# Altium PCB GD_Tcontroller_M.PcbDoc
Units mil, origin at the board's own origin, x right, y up, seen from the top; angles counter-clockwise.
Board outline 5905.51 x 3149.61 mil, 2 copper layers (Top Layer, Bottom Layer); 83 components, 47 nets, 244 pads, 7 vias.
Unrouted connection lines stored in the file: 67.
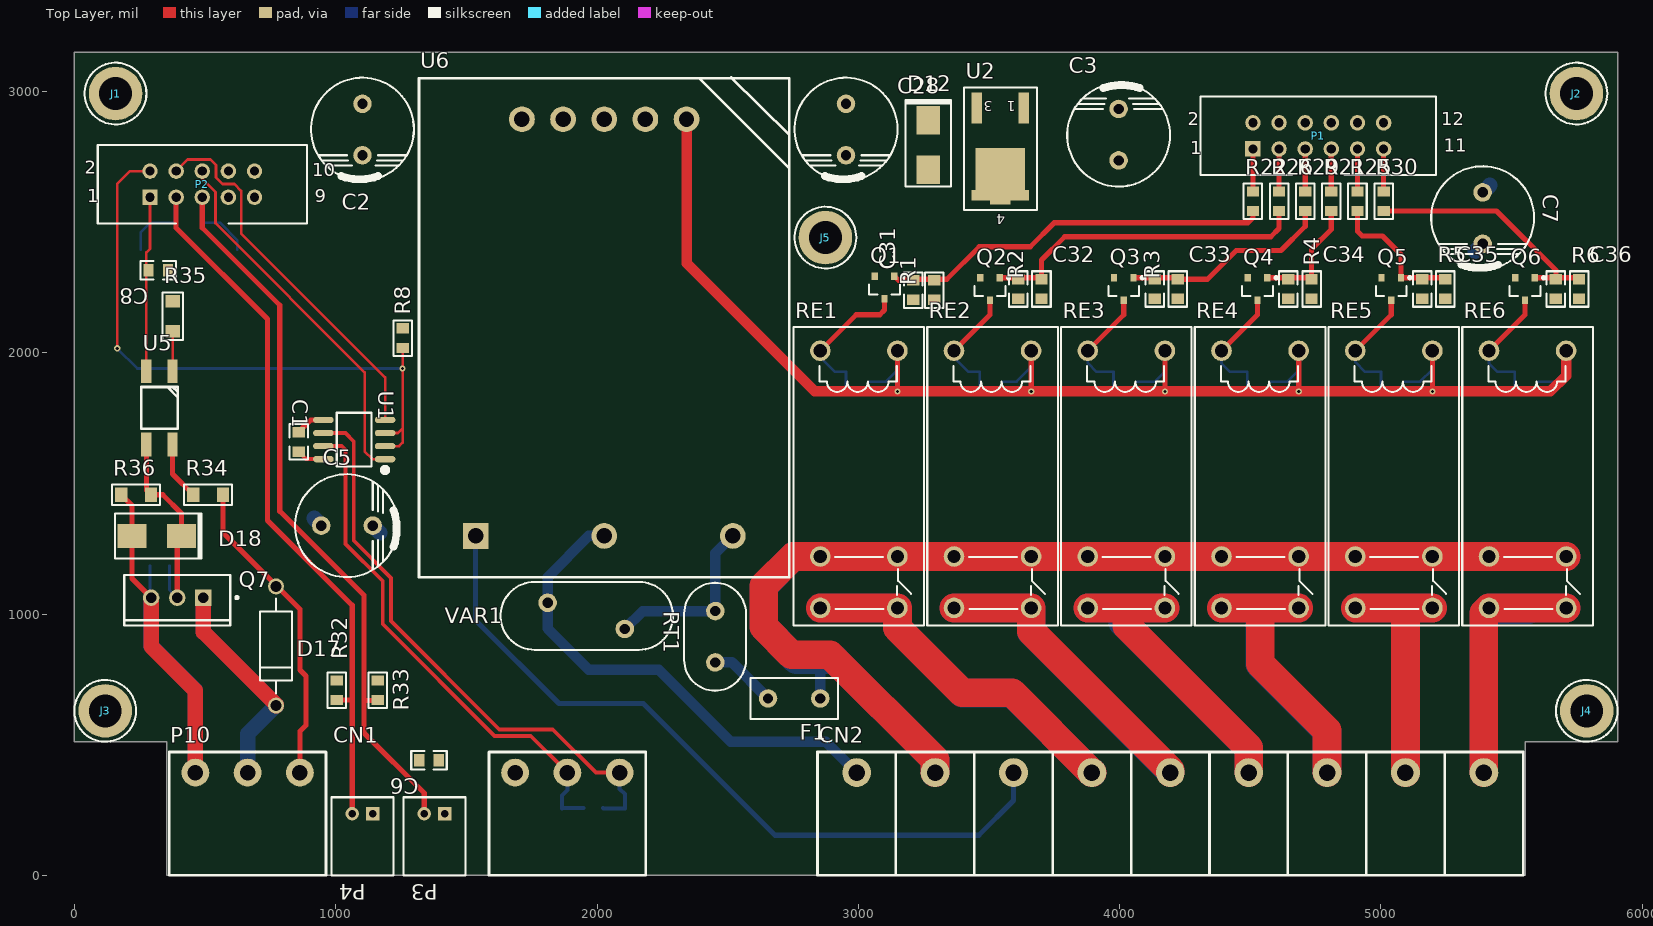
[diagram p0: Top Layer view]
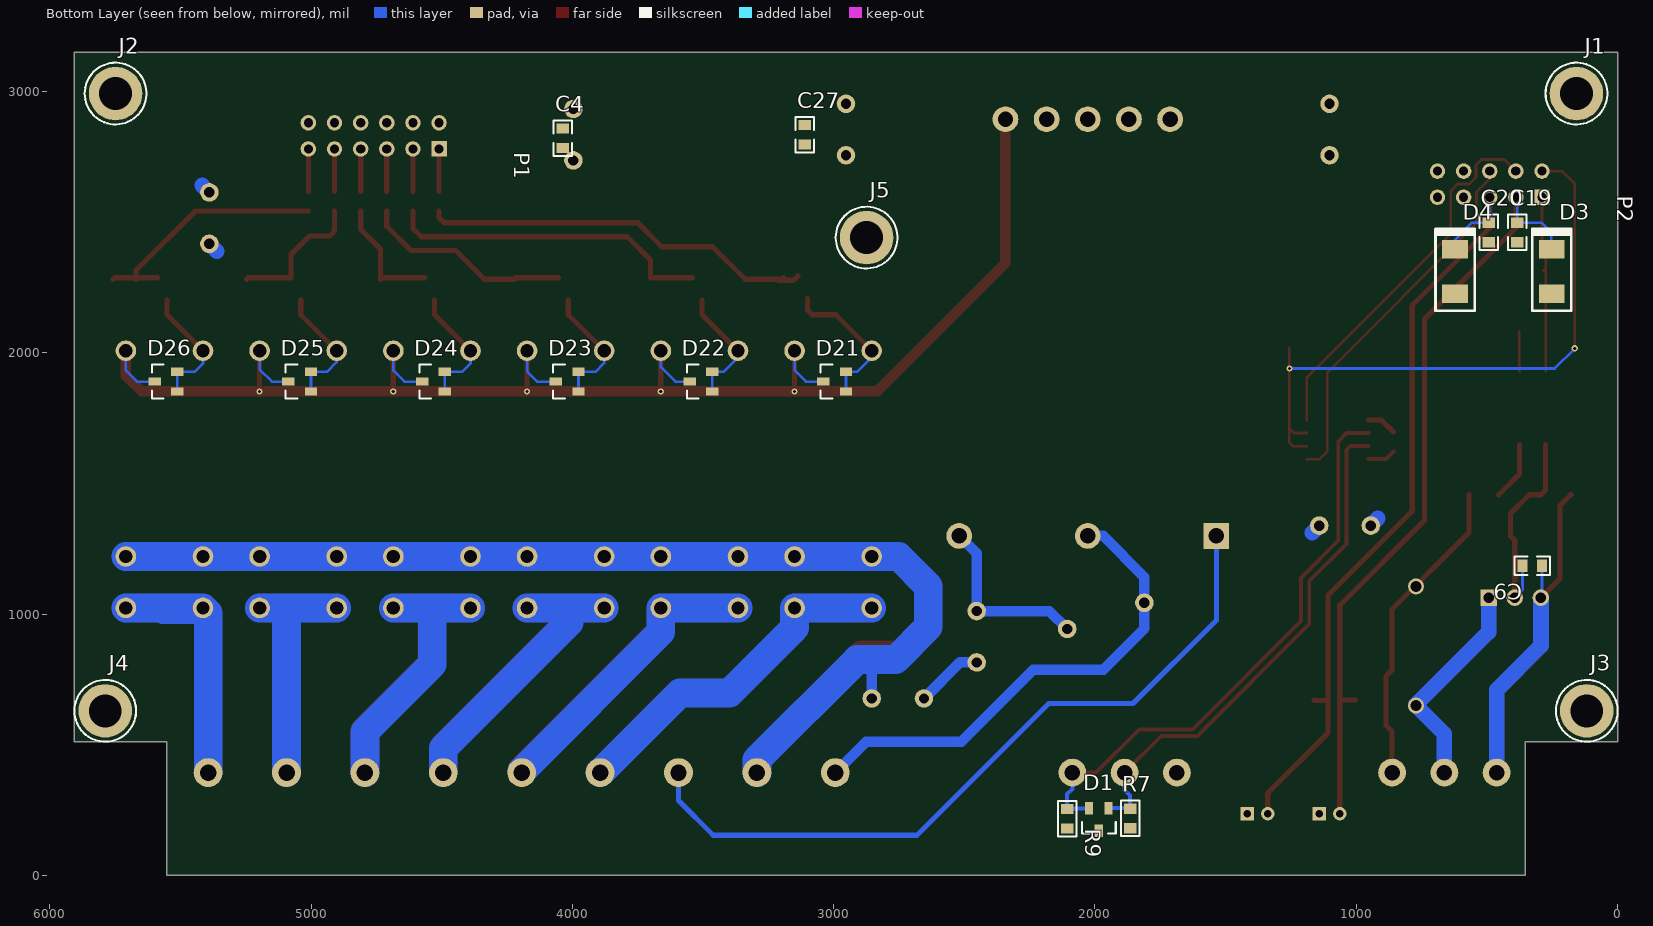
[diagram p1: Bottom Layer view, seen from below]

## Layer stack, top to bottom
Top Solder: solder mask 0.4, Solder Resist, Dk 3.5
Top Layer: signal copper 1.4
Dielectric 1: dielectric 12.6, FR-4, Dk 4.8
Bottom Layer: signal copper 1.4
Bottom Solder: solder mask 0.4, Solder Resist, Dk 3.5

## Board outline
0,511.81 354.33,511.81 354.33,0 5551.18,0 5551.18,511.81 5905.51,511.81 5905.51,3149.6 5905.51,3149.61 0,3149.61

## Design rules (kind name [scope] priority, off if disabled: settings)
Clearance [All] p1: gap=10
DiffPairsRouting [All] p1: maxlimit=10 minlimit=10 mostfreqgap=10 toplayer_minwidth=15 toplayer_maxwidth=15 toplayer_prefwidth=15 bottomlayer_minwidth=15 bottomlayer_maxwidth=15 bottomlayer_prefwidth=15 maxuncoupledlength=500
PolygonConnect [All] p1: connectstyle=Relief reliefconductorwidth=10 reliefentries=4 polygonreliefangle="90 Angle" airgapwidth=10
RoutingVias [All] p1: holewidth=12 width=24 viastyle="Through Hole" minholewidth=12 minwidth=24 maxholewidth=28 maxwidth=50
SolderMaskExpansion [All] p1: expansion=4
Width [All] p1: maxlimit=500 minlimit=8 preferedwidth=8
29 further rules are at their usual default settings.

## Classes and differential pairs
component class GD_Tcontroller: CN1 D3 D4 J1 J2 J3 J4 J5 P1 P2 P3 P4
component class U_GD_Tcontroller_PWM: C8 C9 D17 D18 P10 Q7 R34 R35 R36 U5
component class U_GD_Tcontroller_Sensor: C19 C20 R32 R33
component class U_GD_Tcontroller_Relay: C31 C32 C33 C34 C35 C36 CN2 D21 D22 D23 D24 D25 D26 Q1 Q2 Q3 Q4 Q5 Q6 R1 R2 R3 R4 R5 R6 R21 R22 R25 R26 R29 R30 RE1 RE2 RE3 RE4 RE5 RE6
component class GD_Tcontroller_485: C1 D1 R7 R8 R9 U1
component class U_GD_Tcontroller_Power: C2 C3 C4 C5 C6 C7 C27 C28 D12 F1 RT1 U2 U6 VAR1
differential pair RS485: +RS485_P -RS485_N

## Components (designator, comment, footprint, x,y, rotation, side; value= is the part's Value field where it differs from the comment)
C1 "CAP" C0805 858,1659 r90 top
C2 "CAPACITOR" CA10X16P5#1 1102.36,2755.91 r90 top
C3 "CAPACITOR" CA10X16P5#1 3996.06,2933.07 r270 top
C4 "CAP" C0805 4036.42,2820.87 r270 bottom
C5 "CAPACITOR" CA10X16P5#2 1141.73,1338.58 r180 top
C6 "CAP" C0805 1357,441 r0 top
C7 "CAPACITOR" CA10X16P5#2 5389,2417 r90 top
C8 "CAP" C0805 320.9,2315.76 r0 top
C9 "CAP" C0805 326.77,1185.04 r180 bottom
C19 "CAP 0.1uF 50V 0805(2012)" C0805 383.81,2460.65 r90 bottom
C20 "CAP 0.1uF 50V 0805(2012)" C0805 493.81,2460.65 r90 bottom
C27 "CAP" C0805 3110.24,2834.65 r270 bottom
C28 "CAPACITOR" CA10X16P5#1 2952.76,2755.91 r90 top
C31 "CAP" C0805 3210,2240 r270 top
C32 "CAP" C0805 3612.2,2244.09 r270 top
C33 "CAP" C0805 4133.86,2244.09 r270 top
C34 "CAP" C0805 4645.67,2244.09 r270 top
C35 "CAP" C0805 5157.48,2244.09 r270 top
C36 "CAP" C0805 5669.29,2244.09 r270 top
CN1 "Header 3" HT5.08-3P-H 2086.61,393.7 r180 top locked
CN2 "Header 9" KF7.62-9P 5393.7,393.7 r180 top locked
D1 "TVS-D" SOT23-123 1985.51,218.19 r0 bottom
D3 "SMAJ5.0A" SMA 251.97,2311.02 r0 bottom
D4 "SMAJ5.0A" SMA 622.05,2311.02 r0 bottom
D12 "SMBJ15A" SMB 3267.72,2795.28 r270 top
D17 "FR207" ONSC-AXIAL_LEAD-2-59AA-01_P 771.65,877.95 r90 top
D18 "ZENER" SMB 314.96,1299.21 r180 top
D21 "BAS40-05" SOT23-123 2992.13,1889.76 r90 bottom
D22 "BAS40-05" SOT23-123 3503.94,1889.76 r90 bottom
D23 "BAS40-05" SOT23-123 4015.75,1889.76 r90 bottom
D24 "BAS40-05" SOT23-123 4527.56,1889.76 r90 bottom
D25 "BAS40-05" SOT23-123 5039.37,1889.76 r90 bottom
D26 "BAS40-05" SOT23-123 5551.18,1889.76 r90 bottom
F1 "Fuse" 392XXXX000 2854.33,677.17 r180 top
J1 "Socket" SCREWFG3_2 157.48,2992.13 r180 top
J2 "Socket" SCREWFG3_2 5748.03,2992.13 r180 top
J3 "Socket" SCREWFG3_2 118.11,629.92 r180 top
J4 "Socket" SCREWFG3_2 5787.4,629.92 r180 top
J5 "Socket" SCREWFG3_2 2874.02,2440.94 r180 top
P1 "Header 6X2" DC3-12P 4510,2780 r0 top
P2 "Header 5X2" DC3-10P 289.4,2595.29 r0 top
P3 "Header 2" PH2.0-2P-H 1417.32,236.22 r0 top
P4 "Header 2" PH2.0-2P-H 1141.73,236.22 r0 top
P10 "Header 3" HT5.08-3P-H 862.99,393.7 r180 top locked
Q1 "BCV47" INF-SOT23_L 3100,2250 r270 top
Q2 "BCV47" INF-SOT23_L 3503.94,2244.09 r270 top
Q3 "BCV47" INF-SOT23_L 4015.75,2244.09 r270 top
Q4 "BCV47" INF-SOT23_L 4527.56,2244.09 r270 top
Q5 "BCV47" INF-SOT23_L 5039.37,2244.09 r270 top
Q6 "BCV47" INF-SOT23_L 5551.18,2244.09 r270 top
Q7 "IRF540N" ONSC-TO-220-3-221A-09_AF 393.7,1062.99 r270 top
R1 "" R0805 3290,2240 r270 top
R2 "" R0805 3700.79,2244.09 r270 top
R3 "" R0805 4222.44,2244.09 r270 top
R4 "" R0805 4734.25,2244.09 r270 top
R5 "" R0805 5246.06,2244.09 r270 top
R6 "" R0805 5757.87,2244.09 r270 top
R7 "RES" R0805 1865.51,218.19 r270 bottom
R8 "RES" R0805 1256,2056 r270 top
R9 "RES" R0805 2106.51,217.19 r90 bottom
R21 "RES" R0805 4810,2580 r90 top
R22 "RES" R0805 4510,2580 r90 top
R25 "RES" R0805 4910,2580 r90 top
R26 "RES" R0805 4610,2580 r90 top
R29 "RES" R0805 4710,2580 r90 top
R30 "RES" R0805 5010,2580 r90 top
R32 "10K 1% 0805(2012)" R0805 1003.94,708.66 r90 top
R33 "10K 1% 0805(2012)" R0805 1161.42,708.66 r90 top
R34 "Res3" R1206 511.81,1456.69 r0 top
R35 "Res3" R1206 377,2140 r270 top
R36 "Res3" R1206 236.22,1456.69 r0 top
RE1 "RELAY SP" G5RL-1A-E 3149.61,2007.87 r270 top locked
RE2 "RELAY SP" G5RL-1A-E 3661.42,2007.87 r270 top locked
RE3 "RELAY SP" G5RL-1A-E 4173.23,2007.87 r270 top locked
RE4 "RELAY SP" G5RL-1A-E 4685.04,2007.87 r270 top locked
RE5 "RELAY SP" G5RL-1A-E 5196.85,2007.87 r270 top locked
RE6 "RELAY SP" G5RL-1A-E 5708.66,2007.87 r270 top locked
RT1 "NTC" NTC8_5x6P5 2452.76,814.96 r90 top
U1 "SN65HVD08D" SOIC8 1189,1593 r90 top
U2 "LM1117_ADJ" DPAK-134 3543.31,2755.91 r180 top
U5 "TLP181" TLP181 275.59,1929.13 r270 top
U6 "LH05-10B12" LH05X 1535.43,1299.21 r90 top locked
VAR1 "VARISTOR" VAR16_7X6_6P7_5 1811.02,1043.31 r0 top

## Footprints (in the part's own frame and the unit in brackets; to place one, negate y for a bottom-side part, rotate by r counter-clockwise, add the part's x,y. Pads: shape width x height; smd on the part's side, far side on the other; paste and mask are expansions set on the pad)
392XXXX000 [mm] "8.5X4X8"
  round 1.8 hole 1: 1(0,0) 2(5.08,0)
  silkscreen extent -1.73,-1.99 6.77,2.01, body extent -1.73,-1.99 6.77,2.01, height 8
C0805 [mm]
  rect 1x1.2 smd: 1(-0.95,0) 2(0.95,0)
  silkscreen extent -1.73,-0.9 1.73,0.9, body extent -1.55,-0.7 1.55,0.7, height 1
CA10X16P5#1 [mm]
  round 1.8 hole 1: 1(0,0) 2(5,0)
  silkscreen extent -2.46,-5 7.54,5, body extent -2.47,-5.01 7.55,5.01, height 16
CA10X16P5#2 [mm]
  round 1.8 hole 1: 1(0,0) 2(5,0)
  Bottom Layer lines w1.5: 5.687,-0.707 4.98,0 ; 0,0 -0.707,0.707
  silkscreen extent -2.46,-5 7.54,5, body extent -2.47,-5.01 7.55,5.01, height 16
DC3-10P [mm] "Connector; Header; 10x2 Position"
  rect 1.5x1.5 hole 0.9: 1(0,0)
  round 1.5 hole 0.9: 2(0,2.54) 3(2.54,0) 4(2.54,2.54) 5(5.08,0) 6(5.08,2.54) 7(7.62,0) 8(7.62,2.54) 9(10.16,0) 10(10.16,2.54)
  silkscreen extent -5.08,-2.54 15.24,5.08, body extent -5.08,-2.54 15.24,5.08, height 16
DC3-12P [mm] "Connector; Header; 10x2 Position"
  rect 1.5x1.5 hole 0.9: 1(0,0)
  round 1.5 hole 0.9: 2(0,2.54) 3(2.54,0) 4(2.54,2.54) 5(5.08,0) 6(5.08,2.54) 7(7.62,0) 8(7.62,2.54) 9(10.16,0) 10(10.16,2.54) 11(12.7,0) 12(12.7,2.54)
  silkscreen extent -5.08,-2.54 17.78,5.08, body extent -5.08,-2.54 17.78,5.08, height 16
DPAK-134 [mm] "LD1117"
  rect 1x3 smd: 1(-2.285,-4.6) 3(2.285,-4.6)
  rect 0.4x1 smd: 4(-2.6,3.9) 4(2.6,3.9)
  rect 2x0.4 smd: 4(0,4.6)
  rect 4.8x5.1 smd: 4(0,1.85)
  silkscreen extent -3.58,-6.6 3.52,5.3, body extent -3.15,-6.45 3.15,5.15, height 2.4
G5RL-1A-E [mm] "29x12.7x15.7"
  round 2 hole 1.3: 1(0,0) 2(0,-7.5) 3(20,-7.5) 3(20,0) 4(25,-7.5) 4(25,0)
  silkscreen extent -2.3,-10.1 26.7,2.6, body extent -2.3,-10.1 26.7,2.6, height 15.7
HT5.08-3P-H [mm]
  round 2.7 hole 1.5: 1(0,0) 2(5.08,0) 3(10.16,0)
  silkscreen extent -2.54,-2 12.7,10, body extent -2.54,-2.03 12.7,10.03, height 12
INF-SOT23_L [mm] "SOT23, 3-Leads, Body 2.9x1.3 mm, Pitch 0.95 mm, IPC High Density"
  rect 0.75x0.6 smd: 1(-1.1,0.95) 2(-1.1,-0.95) 3(1.1,0)
  silkscreen extent -1.22,-1.5 0.7,1.93, body extent -0.7,-1.5 0.7,1.5, height 1.1
KF7.62-9P [mm]
  round 2.8 hole 1.6: 1(0,0) 2(7.62,0) 3(15.24,0) 4(22.86,0) 5(30.48,0) 6(38.1,0) 7(45.72,0) 8(53.34,0) 9(60.96,0)
  silkscreen extent -3.81,-2.03 64.77,10, body extent -3.68,-1.91 64.77,9.91, height 12.4
LH05X [mm]
  rect 2.5x2.5 hole 1.5: 1(0,0)
  round 2.5 hole 1.5: 2(0,-12.5) 3(0,-25) 4(40.5,-4.5) 5(40.5,-8.5) 6(40.5,-12.5) 7(40.5,-16.5) 8(40.5,-20.5)
  silkscreen extent -4,-30.5 44.56,5.5, body extent -3.94,-30.48 44.58,5.46, height 20.5
NTC8_5x6P5 [mm] "8_5x6P5x13"
  round 1.8 hole 1: 1(0,0) 2(5,0)
  silkscreen extent -2.75,-2.98 7.75,3.03, body extent -2.9,-3.1 7.8,3.1, height 13
ONSC-AXIAL_LEAD-2-59AA-01_P [mm] "AXIAL, 2-Leads, Diameter 3.1mm"
  round 1.55 hole 1.05: 1(-5.795,0) 2(5.795,0)
  silkscreen extent -4.62,-1.55 4.62,1.55
ONSC-TO-220-3-221A-09_AF [mm] "FM, 3-Leads, Body 10.3x4.85mm, Pitch 2.54mm"
  rect 1.6x1.6 hole 1: 1(0,2.54)
  round 1.6 hole 1: 2(0,0) 3(0,-2.54)
  silkscreen extent -2.2,-5.15 2.7,5.93, body extent -2.18,-5.15 2.67,5.15, height 19.68
PH2.0-2P-H [mm] "Connector; Header; 2 Position"
  rect 1.3x1.3 hole 0.7: 1(0,0)
  round 1.3 hole 0.7: 2(-2,0)
  silkscreen extent -4,-6 2,1.6, body extent -4,-6 2,1.6, height 5
R0805 [mm]
  rect 1x1.2 smd: 1(-0.95,0) 2(0.95,0)
  silkscreen extent -1.73,-0.9 1.73,0.9, body extent -1.55,-0.7 1.55,0.7, height 1
R1206 [mm]
  rect 1.2x1.4 smd: 1(-1.45,0) 2(1.45,0)
  silkscreen extent -2.32,-1 2.32,1, body extent -2.15,-0.8 2.15,0.8, height 1
SCREWFG3_2 [mm]
  round 5.2 hole 3.2: 1(0,0)
  silkscreen extent -3,-3 3,3
SMA [mm]
  rect 2.5x1.8 smd: 1(0,-2.15) 2(0,2.15)
  silkscreen extent -1.91,-4.13 1.91,3.81, body extent -1.97,-4.19 1.97,3.87, height 2.5
SMB [mm] "P6SMB"
  rect 2.8x2.3 smd: 1(-2.4,0) 2(2.4,0)
  silkscreen extent -4.35,-2.2 4.05,2.2, body extent -4.45,-2.3 4.15,2.3, height 2.5
SOIC8 [mm]
  oval 0.61x2 smd: 1(0,0) 2(1.27,0) 3(2.54,0) 4(3.81,0) 5(3.81,6) 6(2.54,6) 7(1.27,6) 8(0,6)
  silkscreen extent -1.3,-0.25 4.51,4.7, body extent -0.7,1.3 4.51,4.7, height 1.75
SOT23-123 [mm]
  rect 0.8x1.2 smd: 1(-0.95,-1) 2(0.95,-1) 3(0,1.2)
  silkscreen extent -1.65,0.33 1.65,1.48, body extent -1.6,-1.3 1.6,1.3, height 1.2
TLP181 [mm]
  rect 2.3x1 smd: 1(0,2.54) 2(0,0) 3(7.112,0) 4(7.112,2.54)
  silkscreen extent 1.52,-0.51 5.59,3.05
VAR16_7X6_6P7_5 [mm]
  round 1.8 hole 1: 1(0,0) 2(7.5,-2.54)
  silkscreen extent -4.57,-4.57 12.19,2.03, body extent -4.5,-4.6 12.2,2, height 21

## Part data
C1 C4 C6 C8 C9 C27 C31 C32 C33 C34 C35 C36: library part EC00014, "CAP SMD CR X7R 50V 10% 0.1uF 0805 ROHS"
C2 C3 C5 C7 C28: library part EC00095, "CAP 35V 20% 330uF 10X16X0.6MM ROHS，7000hours"
C19 C20: library part CMP-1036-00070-1, "CAP 0.1uF 50V ±20% 0805 (2012 Metric) Thickness 1mm SMD"
CN1 P10: "Header, 3-Pin"
CN2: "Header, 9-Pin"
D1: library part ED00007, "DIODE TVS 7V 12V 17A 400W SOT-23 SMD ROHS"
D3 D4 D12 D18: library part ED00032
D17: library part Diode, "Default Diode"
D21 D22 D23 D24 D25 D26: library part ED00044, "DIODE Schottky Diode 40V 0.2A SOT-23 SMD ROHS"
F1: library part EF00005, "FUSE,Ceramic,1.6A,25A@250VAC,8.5x8mm,ROHS"
P1: "Header, 6-Pin, Dual row"
P2: "Header, 5-Pin, Dual row"
P3 P4: "Header, 2-Pin"
Q1 Q2 Q3 Q4 Q5 Q6: library part CMP-1196-00014-1, "NPN Silicon Darlington Transistor, 60 V VCEO, 500 mA IC, SOT23, Reel, Green"
Q7: library part MOSFET-N, "N-Channel MOSFET"
R1 R2 R3 R4 R5 R6 R8: library part ER00213, "RES THICK_FILM SMD 10K ohm 5% 1/10W ROHS 0603"
R7 R9: library part ER00021, "RES THICK_FILM SMD 39K 5% 1/8W ROHS 0805"
R21 R22 R25 R26 R29 R30: library part ER00035, "RES THICK_FILM SMD 100 OHM 5% 1/8W ROHS 0805"
R32 R33: library part CMP-1013-00098-1, "10K 0.125W 5% 0805 (2012 Metric)  SMD"
R34 R35 R36: "Resistor"
RE1 RE2 RE3 RE4 RE5 RE6: library part EK00005, "Relay,12VDC,16A,250VAC"
RT1: library part EF00003
U1: library part EU00041, "IC 5V,RS-485,10Mbps,16KV,TRANSCEIVERS,SOIC-8,ROHS"
U2: library part EU00066, "IC REG VOLT +3.3V LDO 800MA DPAK ROHS"
U5: library part Optoisolator1, "4-Pin Phototransistor Optocoupler"
U6: library part LH05-10B05
VAR1: library part ER00200, "MOV 320V 14MM 80J LDFR ROHS"

## Via types
v1: diameter 24, hole 12, Top Layer to Bottom Layer, 7 vias

## Nets (pads, with @x,y where several pads share a name; then routed paths per layer and width w, separated by ;. In a path a pad name is that pad's centre, name@x,y a point inside that pad or via, vN(x,y) a via of type N, cw(c..) or ccw(c..) an arc to the next point about the centre after c; other vN are vias at no path point)
3.3V: C1.1 C3.2 C4.2 C5.2 C6.2 P1.2 P1.4 P1.6 P3.1 P4.1 R9.1 R35.1 U1.8 U2.4 | length 106.6
  Top Layer w15: C1.1 886.6,1593 U1.8
12V: C2.2 C7.2 C27.1 C28.2 D12.1 D21.3 D22.3 D23.3 D24.3 D25.3 D26.3 P2.10 RE1.1 RE2.1 RE3.1 RE4.1 RE5.1 RE6.1 U2.3 U6.8 | length 6232
  Top Layer w20: v1(3149.61,1852) RE1.1 ; v1(3661.42,1852) RE2.1 ; v1(4173.23,1852) RE3.1 ; v1(4685.04,1852) RE4.1 ; v1(5196.85,1852) RE5.1
  Top Layer w40: U6.8 2342.52,2342.48 2833,1852 v1(3149.61,1852) v1(3661.42,1852) v1(4173.23,1852) v1(4685.04,1852) v1(5196.85,1852) 5648,1852 5708.66,1912.66 RE6.1
  Bottom Layer w10: D21.3 3105.77,1889.77 3149.61,1933.61 RE1.1 ; D22.3 3605.77,1889.77 3661.42,1945.42 RE2.1 ; D23.3 4134.77,1889.77 4173.23,1928.23 RE3.1 ; D24.3 4642.77,1889.77 4685.04,1932.04 RE4.1 ; D25.3 5149.77,1889.77 5196.85,1936.85 RE5.1 ; D26.3 5665.77,1889.77 5708.66,1932.66 RE6.1
EARTH: CN2.7 U6.1 | length 2884.1
  Bottom Layer w20: U6.1 1535.43,976.38 1854.33,657.48 2177.17,657.48 2681.1,153.54 3460.63,153.54 3593.7,286.61 CN2.7
GND: C1.2 C2.1 C3.1 C4.1 C5.1 C6.1 C7.1 C8.2 C19.1 C20.1 C27.2 C28.1 C31.2 C32.2 C33.2 C34.2 C35.2 C36.2 CN1.3 D1.3 D3.2 D4.2 D12.2 J1.1 J2.1 J5.1 P1.8 P1.10 P1.12 P2.8 P2.9 Q1.2 Q2.2 Q3.2 Q4.2 Q5.2 Q6.2 R1.2 R2.2 R3.2 R4.2 R5.2 R6.2 R7.2 R8.1 R32.2 R33.2 U1.5 U2.1 U6.4 | length 114.1
  Top Layer w20: C1.2 904.6,1743 U1.5
L: CN2.8 F1.1 RE1.3 RE2.3 RE3.3 RE4.3 RE5.3 RE6.3 | length 8527.4
  Top Layer w110: CN2.8 3293.7,442.52 2891.22,845 2744,845 2637.8,951.2 2637.8,1107.8 2750.47,1220.47 2854.33,1220.47 3149.61,1220.47 3366.14,1220.47 3661.42,1220.47 3877.95,1220.47 4173.23,1220.47 4389.76,1220.47 4685.04,1220.47 4901.57,1220.47 5196.85,1220.47 5413.39,1220.47 RE6.3@5708.66,1220.47
  Bottom Layer w40: F1.1 2854.33,826
  Bottom Layer w110: CN2.8 3293.7,442.52 2910.22,826 2854.33,826 2763,826 2637.8,951.2 2637.8,1106.8 2751.47,1220.47 2854.33,1220.47 3149.61,1220.47 3366.14,1220.47 3661.42,1220.47 3877.95,1220.47 4173.23,1220.47 4389.76,1220.47 4685.04,1220.47 4901.57,1220.47 5196.85,1220.47 5413.39,1220.47 RE6.3@5708.66,1220.47
L_OUT1: CN2.6 RE1.4 | length 2689.9
  Top Layer w110: RE1.4@2854.33,1023.62 3149.61,1023.62 3149.61,947.39 3398,699 3588.4,699 CN2.6
  Bottom Layer w110: RE1.4@2854.33,1023.62 3149.61,1023.62 3149.61,947.39 3399,698 3589.4,698 CN2.6
L_OUT2: CN2.5 RE2.4 | length 2285.8
  Top Layer w110: RE2.4@3366.14,1023.62 3661.42,1023.62 3661.42,934.58 4193.7,402.3 CN2.5
  Bottom Layer w110: RE2.4@3366.14,1023.62 3661.42,1023.62 3661.42,931.58 CN2.5@4193.7,399.3
L_OUT3: CN2.4 RE3.4 | length 2241.6
  Top Layer w110: RE3.4@3877.95,1023.62 RE3.4@4173.23,1023.62 ; 4027,1022 4027,955 4493.7,488.3 CN2.4
  Bottom Layer w110: RE3.4@3877.95,1023.62 4012,1023.62 ; RE3.4@4173.23,1023.62 4012,1023.62 ; CN2.4 4493.7,486.3 4012,968 4012,1023.62
L_OUT4: CN2.3 RE4.4 | length 2060.8
  Top Layer w110: RE4.4@4389.76,1023.62 RE4.4@4685.04,1023.62 ; 4538,1022 4538,810 4793.7,554.3 CN2.3
  Bottom Layer w110: RE4.4@4389.76,1023.62 RE4.4@4685.04,1023.62 ; 4536,1023 4536,808 4793.7,550.3 CN2.3
L_OUT5: CN2.2 RE5.4 | length 1841
  Top Layer w110: RE5.4@4901.57,1023.62 RE5.4@5196.85,1023.62 ; CN2.2 5093.7,1014.92
  Bottom Layer w110: RE5.4@4901.57,1023.62 RE5.4@5196.85,1023.62 ; CN2.2 5093.7,1022.92
L_OUT6: CN2.1 RE6.4 | length 2015.8
  Top Layer w110: CN2.1 5393.7,1003.94 5413.39,1023.62 5565,1023.62 RE6.4@5708.66,1023.62
  Bottom Layer w110: CN2.1 5393.7,1003.94 5407.39,1017.62 5565,1017.62 ; RE6.4@5413.39,1023.62 RE6.4@5708.66,1023.62
N: CN2.9 U6.2 VAR1.1 | length 1889.6
  Bottom Layer w40: U6.2 1968.5,1299.21 1811.02,1141.73 1811.02,944.88 1968.5,787.4 2236.22,787.4 2511.81,511.81 2875.59,511.81 CN2.9
NetC9_1: C9.1 D18.1 Q7.2 R36.2 U5.3 | length 808.7
  Top Layer w20: U5.3 275.59,1474.41 R36.2 338.31,1456.69 409.45,1385.55 D18.1 393.7,1283.46 Q7.2
  Bottom Layer w10: C9.1 364.17,1092.52 Q7.2
NetC31_1: C31.1 Q1.1 R1.1 R22.1 | length 1521.9
  Top Layer w20: Q1.1 3153.31,2277.4 C31.1 ; C31.1@3192.91,2287.4 3198.82,2281.5 3338.5,2281.5 3463,2406 3658,2406 3750,2498 4491,2498 4510,2517 R22.1
NetC32_1: C32.1 Q2.1 R2.1 R26.1 | length 1252.9
  Top Layer w20: Q2.1 3700.79,2287.4 3700.79,2354.79 3790,2444 4578,2444 4610,2476 R26.1
NetC33_1: C33.1 Q3.1 R3.1 R29.1 | length 801.8
  Top Layer w20: Q3.1 4216.54,2287.4 R3.1 4336.5,2281.5 4446,2391 4617,2391 4710,2484 R29.1
NetC34_1: C34.1 Q4.1 R4.1 R21.1 | length 464.2
  Top Layer w20: Q4.1 4728.35,2287.4 R4.1 4734.25,2397.25 4810,2473 R21.1
NetC35_1: C35.1 Q5.1 R5.1 R25.1 | length 541.5
  Top Layer w20: R25.1 4910,2465 4928,2447 5005.6,2447 5076.77,2375.83 Q5.1 5240.16,2287.4 R5.1
NetC36_1: C36.1 Q6.1 R6.1 R30.1 | length 959.2
  Top Layer w20: R30.1 5442.4,2542.6 5669.29,2315.71 C36.1@5669.29,2287.4 ; Q6.1 C36.1@5669.29,2287.4 ; C36.1 C36.1@5669.29,2287.4 ; R6.1 5751.97,2287.4 C36.1@5669.29,2287.4
NetD21_1: D21.1 D21.2 Q1.3 RE1.2 | length 574.5
  Top Layer w20: RE1.2 2992.13,2145.67 3081.67,2145.67 3100,2164 Q1.3
  Bottom Layer w10: RE1.2 2854.33,1982.67 2909.83,1927.17 D21.2 D21.1
NetD22_1: D22.1 D22.2 Q2.3 RE2.2 | length 471.3
  Top Layer w20: RE2.2 3503.94,2145.67 Q2.3
  Bottom Layer w10: RE2.2 3366.14,1982.86 3421.83,1927.17 D22.2 D22.1
NetD23_1: D23.1 D23.2 Q3.3 RE3.2 | length 484.7
  Top Layer w20: RE3.2 4015.75,2145.67 Q3.3
  Bottom Layer w10: RE3.2 3877.95,1960.05 3910.83,1927.17 D23.2 D23.1
NetD24_1: D24.1 D24.2 Q4.3 RE4.2 | length 485.1
  Top Layer w20: RE4.2 4527.56,2145.67 Q4.3
  Bottom Layer w10: RE4.2 4389.76,1959.24 4421.83,1927.17 D24.2 D24.1
NetD25_1: D25.1 D25.2 Q5.3 RE5.2 | length 482.1
  Top Layer w20: RE5.2 5039.37,2145.67 Q5.3
  Bottom Layer w10: RE5.2 4901.57,1964.43 4938.83,1927.17 D25.2 D25.1
NetD26_1: D26.1 D26.2 Q6.3 RE6.2 | length 484.9
  Top Layer w20: RE6.2 5551.18,2145.67 Q6.3
  Bottom Layer w10: RE6.2 5413.39,1959.61 5445.83,1927.17 D26.2 D26.1
NetF1_2: F1.2 RT1.1 | length 258.7
  Bottom Layer w40: RT1.1 2516.54,814.96 F1.2
NetR34_1: R34.1 U5.4 | length 225.2
  Top Layer w20: U5.4 375.59,1535.83 R34.1
NetR35_2: R35.2 U5.1 | length 154.4
  Top Layer w10: U5.1 377,1930.54 R35.2
NetRT1_2: RT1.2 U6.3 VAR1.2 | length 690
  Bottom Layer w40: VAR1.2 2174.8,1011.81 RT1.2 2452.76,1232.28 U6.3
PWM1: C8.1 P2.1 U5.2 | length 680.2
  Top Layer w10: U5.2 275.59,2383.86 289.4,2397.67 P2.1 ; C8.1@277.59,2309.86 C8.1
PWM+: D17.2 P10.1 R34.2 | length 1203.9
  Top Layer w20: R34.2 568.9,1312.8 862.99,1018.7 862.99,786.61 886,763.61 886,574.98 862.99,551.97 P10.1
PWM-: C9.2 D18.2 P10.3 Q7.3 R36.1 | length 2044.4
  Top Layer w20: R36.1 220.47,1415.35 D18.2 220.47,1136.22 Q7.3
  Top Layer w60: Q7.3 293.7,877.3 462.99,708.01 P10.3
  Bottom Layer w10: C9.2 289.37,1067.32 Q7.3
  Bottom Layer w60: Q7.3 293,1062.29 293,880 462.99,710.01 P10.3
PWM_OUT1: D17.1 P10.2 Q7.1 | length 1357.8
  Top Layer w60: Q7.1 493.7,931.69 771.65,653.74 D17.1
  Bottom Layer w60: Q7.1 493.7,931.69 771.65,653.74 D17.1 662.99,541.14 P10.2
RELAY1: P1.1 R22.2 | length 162.6
  Top Layer w20: R22.2 P1.1
RELAY2: P1.3 R26.2 | length 162.6
  Top Layer w20: R26.2 P1.3
RELAY3: P1.5 R29.2 | length 162.6
  Top Layer w20: R29.2 P1.5
RELAY4: P1.7 R21.2 | length 162.6
  Top Layer w20: R21.2 P1.7
RELAY5: P1.9 R25.2 | length 162.6
  Top Layer w20: R25.2 P1.9
RELAY6: P1.11 R30.2 | length 162.6
  Top Layer w20: R30.2 P1.11
RS485_EN: P2.2 R8.2 U1.2 U1.3 | length 2415.1
  Top Layer w10: v1(164,2017) 164,2645.89 213.4,2695.29 P2.2 ; U1.2 1243,1643 1256,1656 1256,1718 ; U1.3 1238,1693 1256,1711 1256,1718 ; R8.2 v1(1256,1940) 1256,1718
  Bottom Layer w10: v1(164,2017) 241,1940 v1(1256,1940)
RS485_N: CN1.2 D1.1 R7.1 U1.7 | length 1988.6
  Top Layer w15: U1.7 1023,1643 1037,1629 1037,1269 1180,1126 1180,961.81 1607.75,534.06 1746.26,534.06 CN1.2
  Bottom Layer w15: CN1.2 1886.61,327.56 1865.51,306.46 R7.1 1867.48,257.56 D1.1
RS485_P: CN1.1 D1.2 R9.2 U1.6 | length 2221.3
  Top Layer w15: U1.6 1037,1693 1069,1661 1069,1281 1212,1138 1212,973.04 1625.98,559.06 1830.71,559.06 1996.06,393.7 CN1.1
  Bottom Layer w15: D1.2 2024.88,255.59 2105.51,255.59 2106.3,256.38 2106.3,311.02 2086.61,330.71 CN1.1
RX: P2.6 U1.1 | length 1420.2
  Top Layer w10: P2.6 489.4,2665.6 540,2615 540,2496 1111,1925 1111,1623 1141,1593 U1.1
TS1: C19.2 D3.1 P2.3 P4.2 R32.1 | length 3007.5
  Top Layer w20: P2.3 389.4,2478.6 739,2129 739,1358 1062.99,1034.01 1062.99,671.26 ; R32.1 1062.99,671.26 ; P4.2 1062.99,671.26
  Bottom Layer w10: D3.1@253.81,2395.29 253.81,2460.65 291.21,2498.05 C19.2 383.81,2589.7 P2.3
TS2: C20.2 D4.1 P2.5 P3.2 R33.1 | length 3056.4
  Top Layer w20: P2.5 489.4,2478.6 786,2182 786,1394 1108,1072 1108,545.54 1338.58,314.96 P3.2 ; 1109,669.29 1159.45,669.29 R33.1
  Bottom Layer w10: P2.5 489.4,2502.46 C20.2 556.41,2498.05 623.81,2430.65 D4.1@623.81,2395.29
TS3: P2.7
TX: P2.4 U1.4 | length 1450.1
  Top Layer w10: P2.4 389.4,2696.4 432.82,2739.82 520.18,2739.82 542,2718 542,2671 567,2646 612,2646 638,2620 638,2457 1189,1906 U1.4
pads on no net: J3.1 J4.1 U6.5 U6.6 U6.7

## Silkscreen, mask and mechanical layers (free items; w line width, h text height)
Mechanical 1:
  lines w10: 0,3149.61 0,3149.61 ; 0,3149.61 5905.51,3149.61 ; 0,3149.61 0,511.81 354.33,511.81 354.33,0 5551.18,0 5551.18,511.81 5905.51,511.81 ; 5905.51,511.81 5905.51,511.81 ; 5905.51,511.81 5905.51,3149.6 ; 5905.51,3149.61 5905.51,3149.6
Mechanical 13:
  lines w98.43: 3071,878 3074,878 3360,592 ; 3380,564 3380,565
  lines w200: 1461,937 1461,897.27 1809.27,549 2128.17,549 2244.09,433.07 2244.09,157.48

## Dimensions
354.33,0 to 5551.18,0 on Mechanical 16
5905.51,511.81 to 0,511.81 on Mechanical 16
354.33,0 to 0,3149.61 on Mechanical 16
0,511.81 to 0,3149.61 on Mechanical 16

## Text inside footprints (layer, text, board x,y; h text height)
P1: Top Overlay "12" at 5230,2870 h50; Top Overlay "11" at 5240,2770 h50; Top Overlay "1" at 4270,2760 h50; Top Overlay "2" at 4260,2870 h50
P2: Top Overlay "10" at 909.4,2675.29 h50; Top Overlay "9" at 919.4,2575.29 h50; Top Overlay "1" at 49.4,2575.29 h50; Top Overlay "2" at 39.4,2685.29 h50
U2: Top Overlay "3" at 3513.78,2962.6 h39.37 r180; Top Overlay "1" at 3602.36,2962.6 h39.37 r180; Top Overlay "4" at 3562.99,2529.53 h39.37 r180